# Altium PCB stm32f373-relay-control.PcbDoc (part 1 of 2)
Units mm, origin at the board's own origin, x right, y up, seen from the top; angles counter-clockwise.
Board outline 127.01 x 87.01 mm, 2 copper layers (Top Layer, Bottom Layer), stack 1.571 mm thick; 178 components, 124 nets, 682 pads, 208 vias.
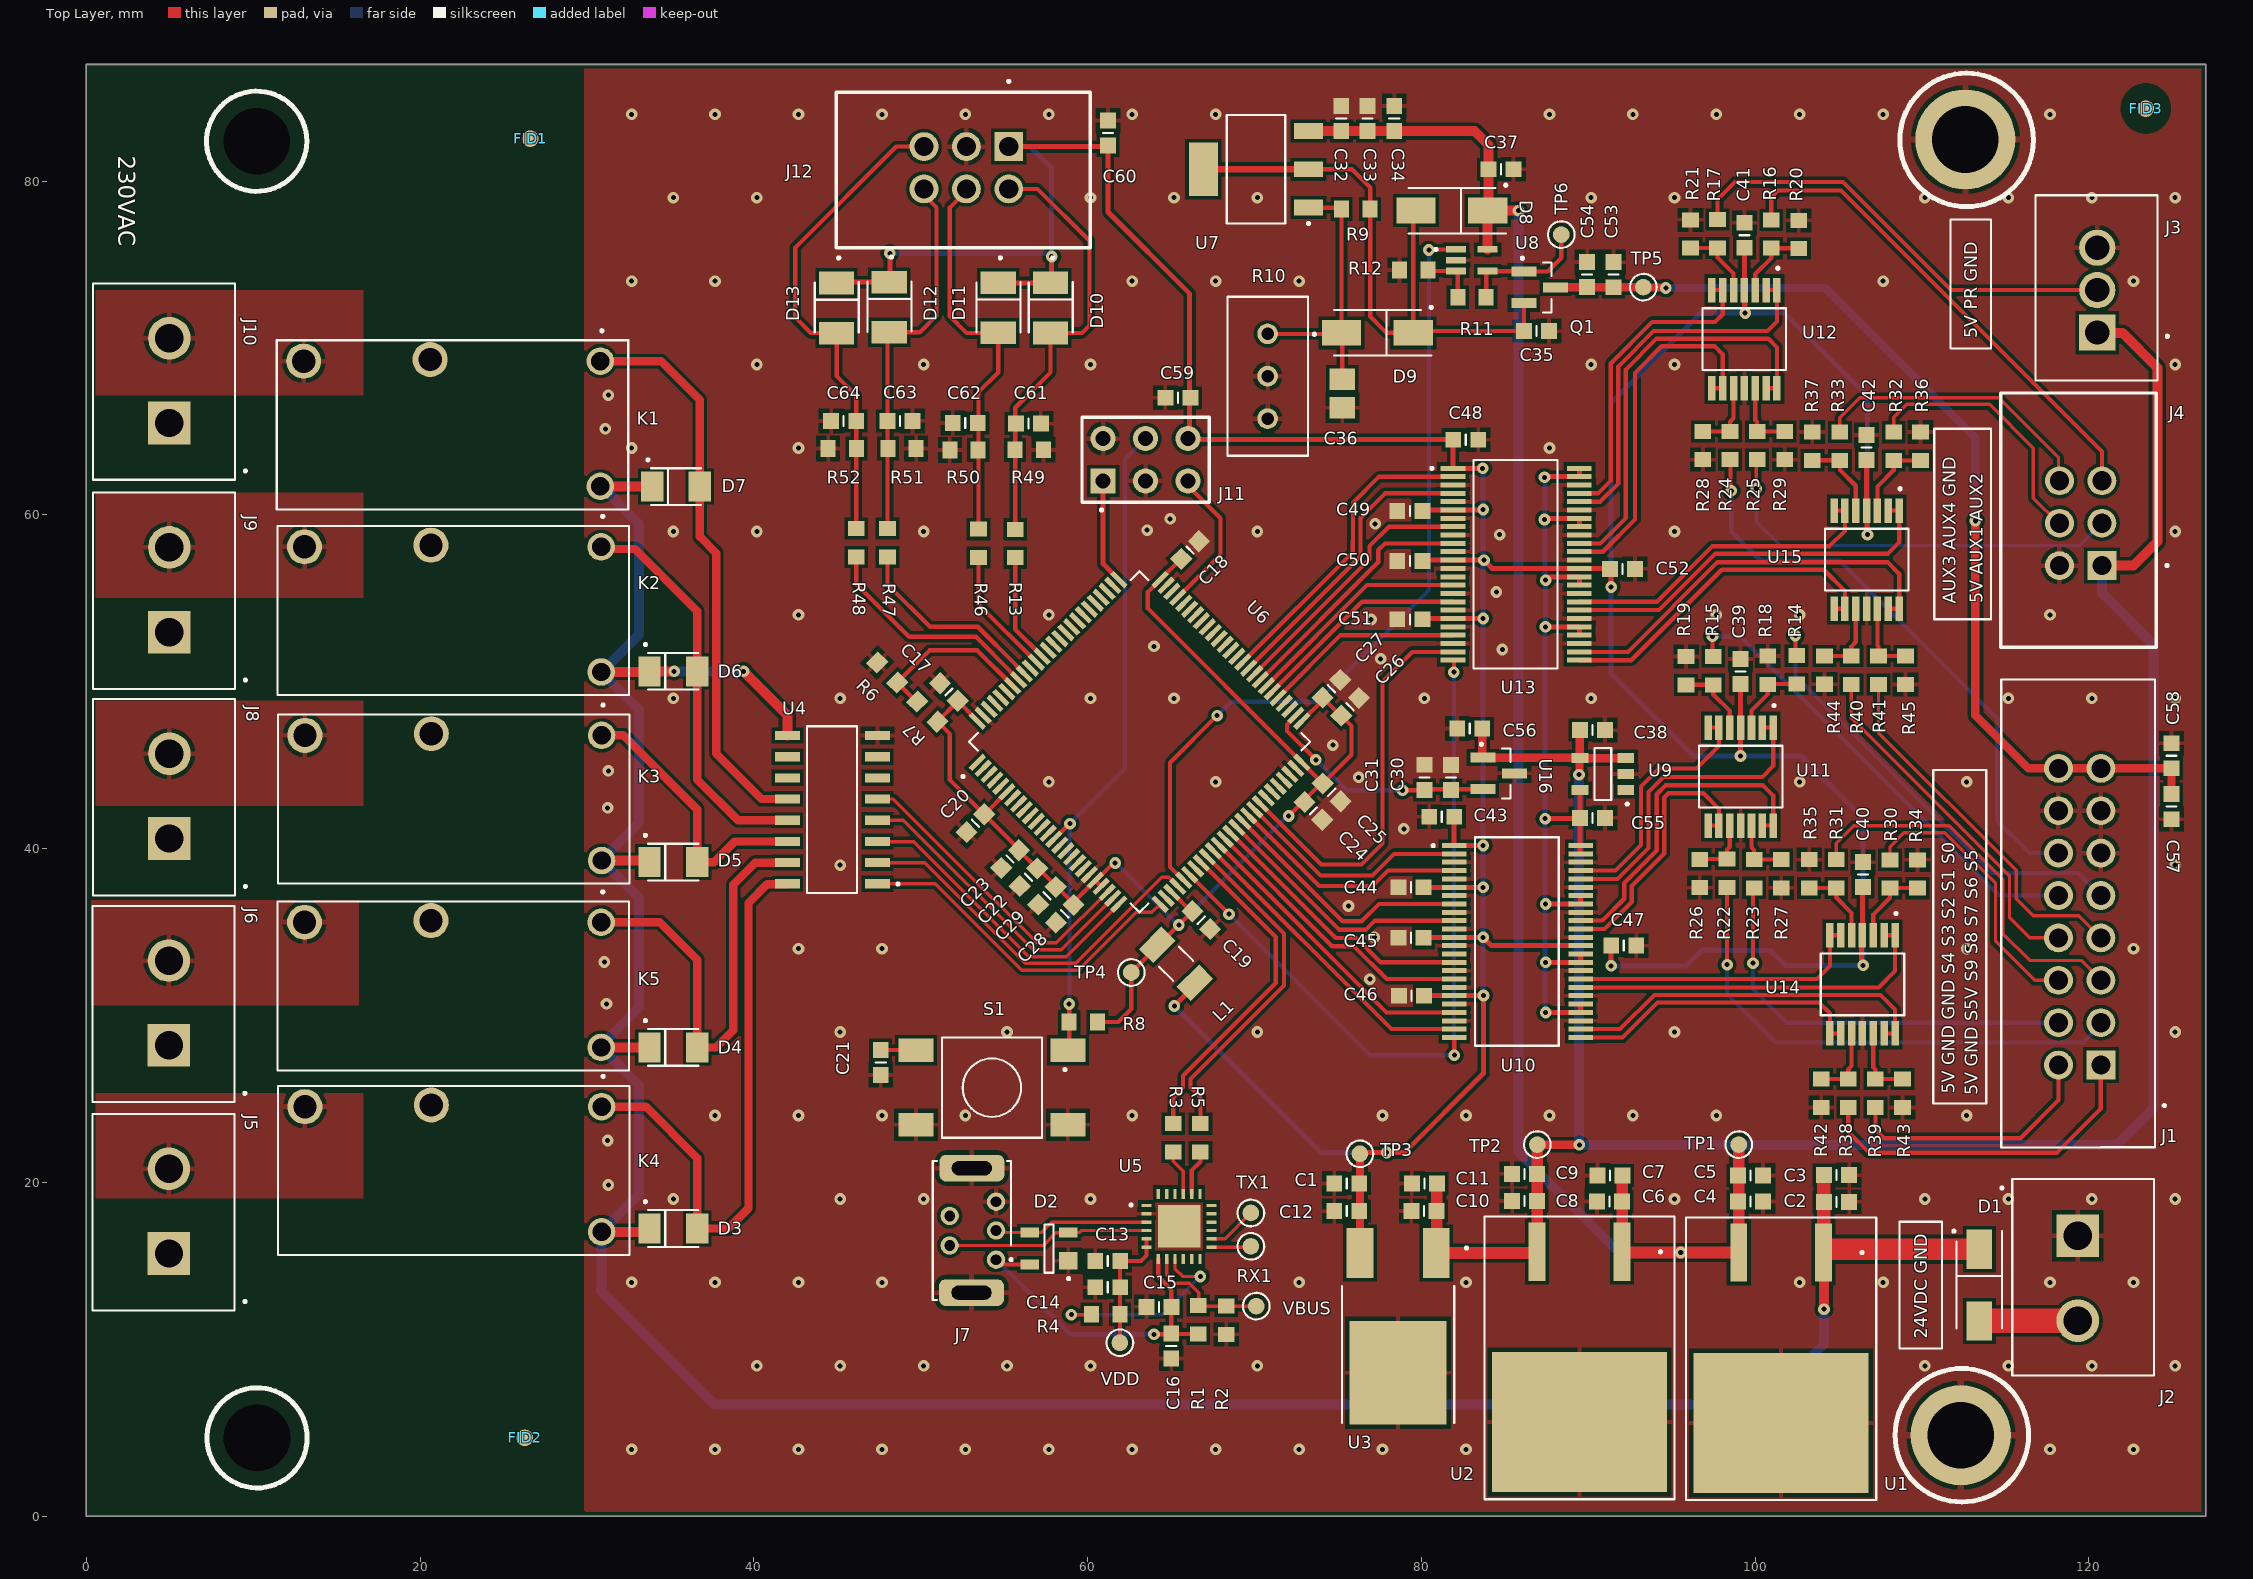
[diagram p0: Top Layer view]
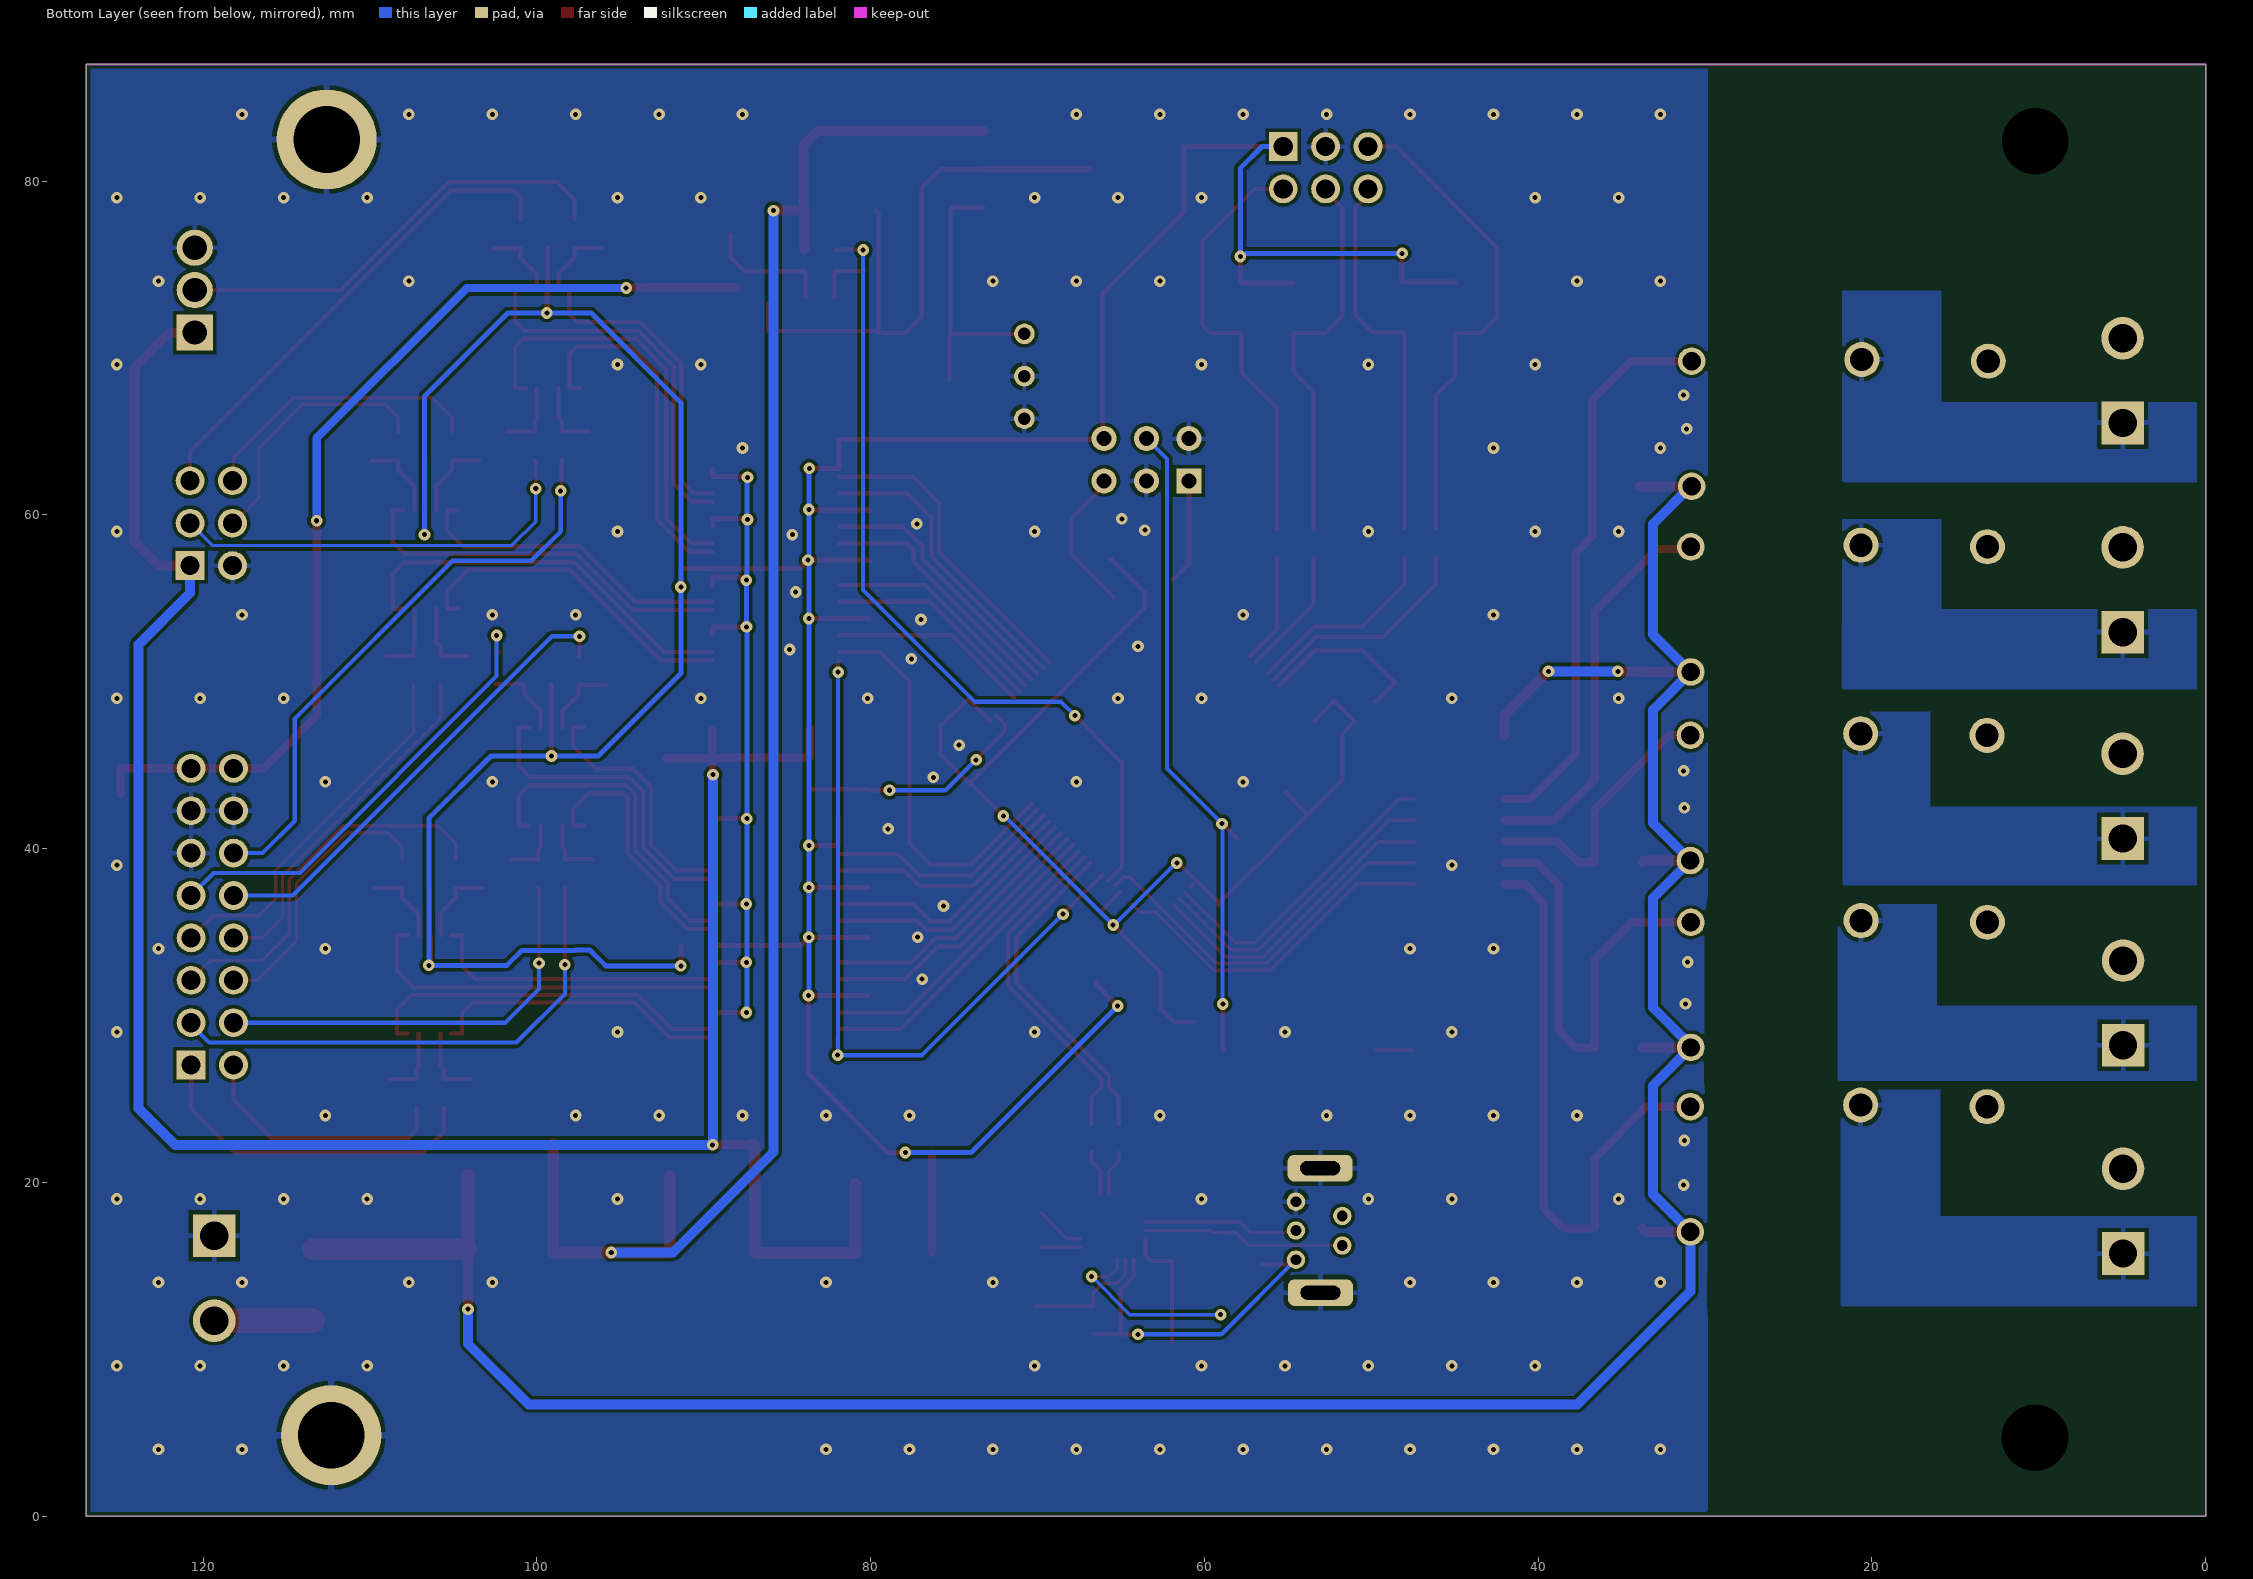
[diagram p1: Bottom Layer view, seen from below]
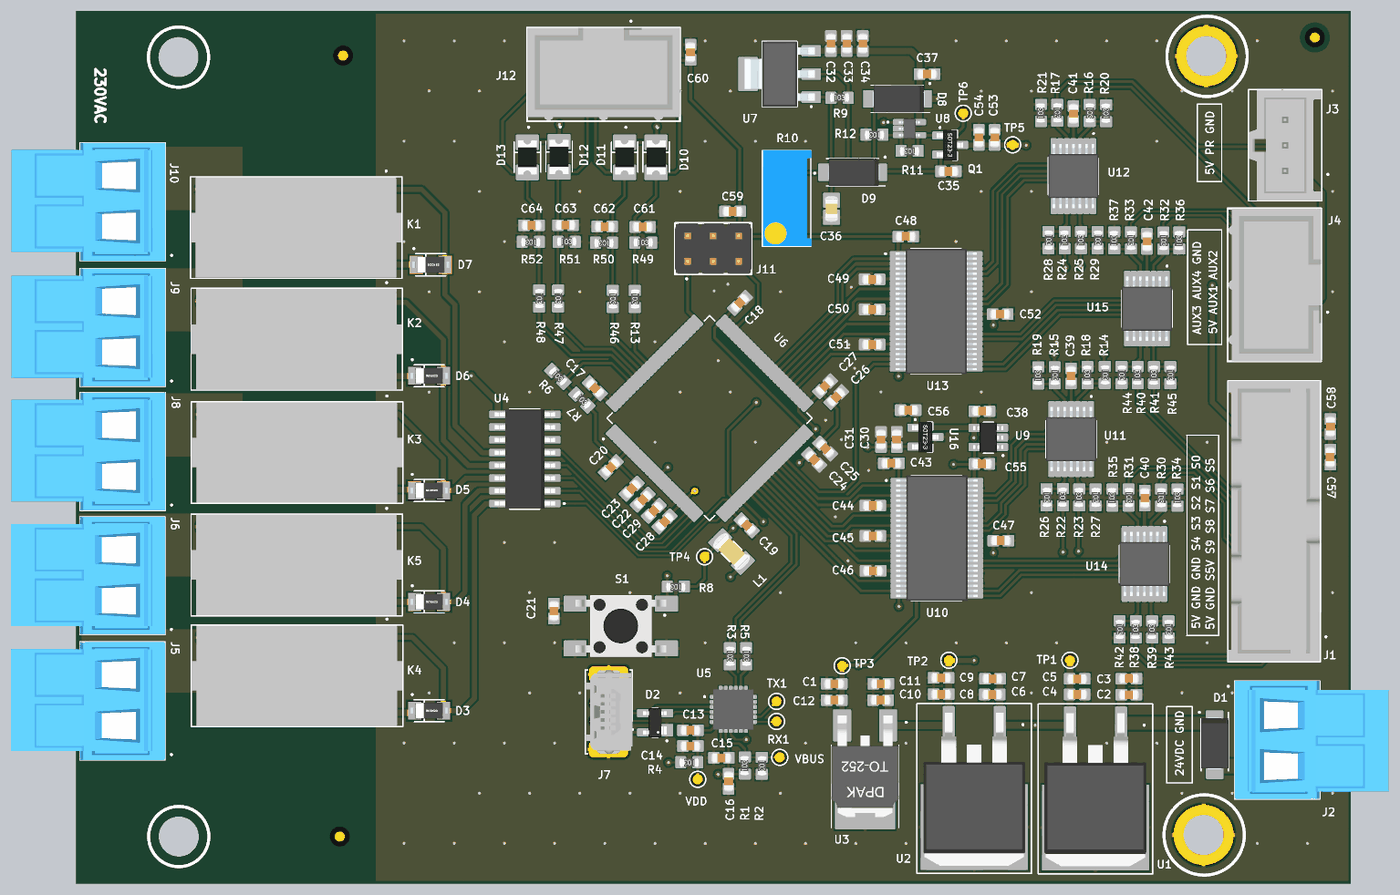
[diagram p3: 3D render of the assembled board from above, using the file's embedded part models]

## Layer stack, top to bottom
Top Solder: solder mask 0.0102, Solder Resist, Dk 3.5
Top Layer: signal copper 0.0356
Dielectric 1: dielectric 1.5, FR-4, Dk 4.8
Bottom Layer: signal copper 0.0356
Bottom Solder: solder mask 0.0102, Solder Resist, Dk 3.5

## Board outline
0,0 127,0 127.004,-0.004 127.004,86.996 127.001,86.995 0.001,86.995 -0.005,87.004

## Design rules (kind name [scope] priority, off if disabled: settings)
Clearance Clearance_AC [InNetClass('230_VAC') vs InNet('GND')] p1: gap=8 ignorepadtopadclearanceinfootprint=TRUE
Clearance [All] p2: gap=0.2 ignorepadtopadclearanceinfootprint=TRUE
DiffPairsRouting DiffPair_DiffPairsRouting [InDifferentialPair ('D')] p1: maxlimit=0.254 minlimit=0.254 mostfreqgap=0.254 substack1={61695DC3-D503-45D9-97A6-45A4C5753EBB} toplayer_{61695dc3-d503-45d9-97a6-45a4c5753ebb}_minwidth=0.381 toplayer_{61695dc3-d503-45d9-97a6-45a4c5753ebb}_maxwidth=0.381 toplayer_{61695dc3-d503-45d9-97a6-45a4c5753ebb}_prefwidth=0.381 bottomlayer_{61695dc3-d503-45d9-97a6-45a4c5753ebb}_minwidth=0.381 bottomlayer_{61695dc3-d503-45d9-97a6-45a4c5753ebb}_maxwidth=0.381 bottomlayer_{61695dc3-d503-45d9-97a6-45a4c5753ebb}_prefwidth=0.381 toplayer_minwidth=0.381 toplayer_maxwidth=0.381 toplayer_prefwidth=0.381 bottomlayer_minwidth=0.381 bottomlayer_maxwidth=0.381 bottomlayer_prefwidth=0.381 substack2={F3A2BA66-AB92-4B2A-958A-8FC78D449C06} toplayer_{f3a2ba66-ab92-4b2a-958a-8fc78d449c06}_minwidth=0.381 toplayer_{f3a2ba66-ab92-4b2a-958a-8fc78d449c06}_maxwidth=0.381 toplayer_{f3a2ba66-ab92-4b2a-958a-8fc78d449c06}_prefwidth=0.381 bottomlayer_{f3a2ba66-ab92-4b2a-958a-8fc78d449c06}_minwidth=0.381 bottomlayer_{f3a2ba66-ab92-4b2a-958a-8fc78d449c06}_maxwidth=0.381 bottomlayer_{f3a2ba66-ab92-4b2a-958a-8fc78d449c06}_prefwidth=0.381 substack3={7FF46698-FA8C-4FAF-96D8-381F52804F8B} toplayer_{7ff46698-fa8c-4faf-96d8-381f52804f8b}_minwidth=0.381 toplayer_{7ff46698-fa8c-4faf-96d8-381f52804f8b}_maxwidth=0.381 toplayer_{7ff46698-fa8c-4faf-96d8-381f52804f8b}_prefwidth=0.381 bottomlayer_{7ff46698-fa8c-4faf-96d8-381f52804f8b}_minwidth=0.381 bottomlayer_{7ff46698-fa8c-4faf-96d8-381f52804f8b}_maxwidth=0.381 bottomlayer_{7ff46698-fa8c-4faf-96d8-381f52804f8b}_prefwidth=0.381 maxuncoupledlength=12.7
DiffPairsRouting [InDifferentialPair('D')] p2: maxlimit=0.254 minlimit=0.254 mostfreqgap=0.254 substack1={61695DC3-D503-45D9-97A6-45A4C5753EBB} toplayer_{61695dc3-d503-45d9-97a6-45a4c5753ebb}_minwidth=0.381 toplayer_{61695dc3-d503-45d9-97a6-45a4c5753ebb}_maxwidth=0.381 toplayer_{61695dc3-d503-45d9-97a6-45a4c5753ebb}_prefwidth=0.381 bottomlayer_{61695dc3-d503-45d9-97a6-45a4c5753ebb}_minwidth=0.381 bottomlayer_{61695dc3-d503-45d9-97a6-45a4c5753ebb}_maxwidth=0.381 bottomlayer_{61695dc3-d503-45d9-97a6-45a4c5753ebb}_prefwidth=0.381 toplayer_minwidth=0.381 toplayer_maxwidth=0.381 toplayer_prefwidth=0.381 bottomlayer_minwidth=0.381 bottomlayer_maxwidth=0.381 bottomlayer_prefwidth=0.381 substack2={F3A2BA66-AB92-4B2A-958A-8FC78D449C06} toplayer_{f3a2ba66-ab92-4b2a-958a-8fc78d449c06}_minwidth=0.381 toplayer_{f3a2ba66-ab92-4b2a-958a-8fc78d449c06}_maxwidth=0.381 toplayer_{f3a2ba66-ab92-4b2a-958a-8fc78d449c06}_prefwidth=0.381 bottomlayer_{f3a2ba66-ab92-4b2a-958a-8fc78d449c06}_minwidth=0.381 bottomlayer_{f3a2ba66-ab92-4b2a-958a-8fc78d449c06}_maxwidth=0.381 bottomlayer_{f3a2ba66-ab92-4b2a-958a-8fc78d449c06}_prefwidth=0.381 substack3={7FF46698-FA8C-4FAF-96D8-381F52804F8B} toplayer_{7ff46698-fa8c-4faf-96d8-381f52804f8b}_minwidth=0.381 toplayer_{7ff46698-fa8c-4faf-96d8-381f52804f8b}_maxwidth=0.381 toplayer_{7ff46698-fa8c-4faf-96d8-381f52804f8b}_prefwidth=0.381 bottomlayer_{7ff46698-fa8c-4faf-96d8-381f52804f8b}_minwidth=0.381 bottomlayer_{7ff46698-fa8c-4faf-96d8-381f52804f8b}_maxwidth=0.381 bottomlayer_{7ff46698-fa8c-4faf-96d8-381f52804f8b}_prefwidth=0.381 maxuncoupledlength=12.7
HoleSize [All] p1: absolutevalues=TRUE maxlimit=10 minlimit=0.025 maxpercent=80.000 minpercent=20.000
HoleToHoleClearance [All] p1: gap=0.2 allowstackedmicrovias=TRUE
MatchedLengths DiffPair_MatchedLengths [InDifferentialPair ('D')] p1: tolerance=25.4 checknetsindiffpair=FALSE checkdiffpairvsdiffpair=TRUE checkxsignals=TRUE checkothers=TRUE
MinimumSolderMaskSliver [All] p1: minsoldermaskwidth=0.1
PasteMaskExpansion [All] p1: expansion=0.1
PlaneClearance [All] p1: clearance=0.5
PlaneConnect [All] p1: pad.planeconnectstyle=Relief pad.reliefexpansion=0.508 pad.reliefentries=4 pad.reliefconductorwidth=0.254 pad.reliefairgap=0.254 via.planeconnectstyle=Direct via.reliefexpansion=0.508 via.reliefentries=4 via.reliefconductorwidth=0.254 via.reliefairgap=0.254
PolygonConnect [All] p1: thpad.connectstyle=Relief thpad.reliefconductorwidth=0.3 thpad.reliefentries=4 thpad.polygonreliefangle="90 Angle" thpad.airgapwidth=0.254 smdpad.connectstyle=Relief smdpad.reliefconductorwidth=0.254 smdpad.reliefentries=4 smdpad.polygonreliefangle="90 Angle" smdpad.airgapwidth=0.254 via.connectstyle=Direct via.reliefconductorwidth=0.254 via.reliefentries=4 via.polygonreliefangle="90 Angle" via.airgapwidth=0.254
RoutingVias [All] p1: holewidth=0.3 width=0.7 viastyle="Through Hole" minholewidth=0.3 minwidth=0.7 maxholewidth=1 maxwidth=1.5
SilkToSilkClearance [All] p1: silktosilkclearance=0.2
SilkToSolderMaskClearance [IsPad] p1: minsilkscreentomaskgap=0.1 clearancetoexposedcopper=TRUE
SolderMaskExpansion [All] p1: expansion=0.1 istentingtop=FALSE soldermaskfromhole=TRUE
UnRoutedNet [All] p1: checkbadconnections=TRUE
Width [All] p1: maxlimit=4 minlimit=0.2 preferedwidth=0.254 substack1={61695DC3-D503-45D9-97A6-45A4C5753EBB} substack2={F3A2BA66-AB92-4B2A-958A-8FC78D449C06} substack3={7FF46698-FA8C-4FAF-96D8-381F52804F8B} checkconnectedcopper=TRUE
20 further rules are at their usual default settings.

## Classes and differential pairs
net class GPIO[1..4]: GPIO1 GPIO2 GPIO3 GPIO4
net class 230_VAC: RELAYCON1 RELAYCON2 RELAYCON3 RELAYCON4 RELAYCON5 RELAYCON6 RELAYCON7 RELAYCON8 RELAYCON9 RELAYCON10
net class SDADC3[1..7]: SDADC31 SDADC32 SDADC33 SDADC34 SDADC35 SDADC36 SDADC37
net class SDADC1[1..9]: SDADC11 SDADC12 SDADC13 SDADC14 SDADC15 SDADC16 SDADC17 SDADC18 SDADC19
net class RELAYCON[1..10]: RELAYCON1 RELAYCON2 RELAYCON3 RELAYCON4 RELAYCON5 RELAYCON6 RELAYCON7 RELAYCON8 RELAYCON9 RELAYCON10
net class DRIVE[1..5]: DRIVE1 DRIVE2 DRIVE3 DRIVE4 DRIVE5
component class U_USB: C13 C14 C15 C16 R1 R2 R3 R4 R5 RX1 TX1 U5 VBUS VDD
component class "U_Sensor Power Supply": C32 C33 C34 C35 C36 C37 C53 C54 D8 D9 Q1 R9 R10 R11 R12 TP5 TP6 U7 U8
component class U_Relays: D3 D4 D5 D6 D7 K1 K2 K3 K4 K5 U4
component class "U_Power Supply": C1 C2 C3 C4 C5 C6 C7 C8 C9 C10 C11 C12 FID1 FID2 FID3 TP1 TP2 TP3 U1 U2 U3
component class "U_OP AMPS": C38 C39 C40 C41 C42 C43 C44 C45 C46 C47 C48 C49 C50 C51 C52 C55 R14 R15 R16 R17 R18 R19 R20 R21 R22 R23 R24 R25 R26 R27 R28 R29 R30 R31 R32 R33 R34 R35 R36 R37 R38 R39 R40 R41 R42 R43 R44 R45 U9 U10 U11 U12 U13 U14 U15
component class U_MCU: C17 C18 C19 C20 C21 C22 C23 C24 C25 C26 C27 C28 C29 C30 C31 C56 L1 R6 R7 R8 S1 TP4 U6 U16
component class U_Connectors: C57 C58 C59 C60 C61 C62 C63 C64 D1 D2 D10 D11 D12 D13 J1 J2 J3 J4 J5 J6 J7 J8 J9 J10 J11 J12 R13 R46 R47 R48 R49 R50 R51 R52

## Components (designator, comment, footprint, x,y, rotation, side; value= is the part's Value field where it differs from the comment)
C1 "Capacitor" CAPC1608N 75.531,19.929 r0 top
C2 "Capacitor" CAPC1608N 104.884,18.837 r0 top
C3 "Capacitor" CAPC1608N 104.884,20.437 r180 top
C4 "Capacitor" CAPC1608N 99.727,18.859 r180 top
C5 "Capacitor" CAPC1608N 99.727,20.416 r0 top
C6 "Capacitor" CAPC1608N 91.27,18.859 r0 top
C7 "Capacitor" CAPC1608N 91.304,20.416 r180 top
C8 "Capacitor" CAPC1608N 86.189,18.887 r0 top
C9 "Capacitor" CAPC1608N 86.179,20.512 r180 top
C10 "Capacitor" CAPC1608N 80.152,18.29 r180 top
C11 "Capacitor" CAPC1608N 80.181,19.929 r0 top
C12 "Capacitor" CAPC1608N 75.531,18.279 r180 top
C13 "Capacitor" CAPC1608N 61.209,15.294 r0 top
C14 "Capacitor" CAPC1608N 61.209,13.717 r0 top
C15 "Capacitor" CAPC1608N 64.284,12.544 r0 top
C16 "Capacitor" CAPC1608N 65.009,10.194 r90 top
C17 "Capacitor" CAPC1608N 51.688,49.388 r135 top
C18 "Capacitor" CAPC1608N 66.14,57.893 r225 top
C19 "Capacitor" CAPC1608N 66.81,35.714 r135 top
C20 "Capacitor" CAPC1608N 53.276,41.526 r45 top
C21 "Capacitor" CAPC1608N 47.603,27.183 r90 top
C22 "Capacitor" CAPC1608N 56.459,38.284 r45 top
C23 "Capacitor" CAPC1608N 55.359,39.372 r45 top
C24 "Capacitor" CAPC1608N 73.535,42.262 r135 top
C25 "Capacitor" CAPC1608N 74.625,43.375 r135 top
C26 "Capacitor" CAPC1608N 75.729,48.502 r225 top
C27 "Capacitor" CAPC1608N 74.611,49.58 r225 top
C28 "Capacitor" CAPC1608N 58.628,36.098 r45 top
C29 "Capacitor" CAPC1608N 57.567,37.177 r45 top
C30 "Capacitor" CAPC1608N 81.767,44.273 r270 top
C31 "Capacitor" CAPC1608N 80.188,44.275 r270 top
C32 "Capacitor" CAPC1608N 75.204,83.754 r90 top
C33 "Capacitor" CAPC1608N 76.779,83.754 r90 top
C34 "Capacitor" CAPC1608N 78.379,83.754 r90 top
C35 "Capacitor" CAPC1608N 86.904,71.011 r0 top
C36 "Capacitor" CAPC2012N 75.261,67.276 r270 top
C37 "Capacitor" CAPC1608N 84.777,80.711 r0 top
C38 "Capacitor" CAPC1608N 90.251,47.102 r180 top
C39 "Capacitor" CAPC1608N 99.121,50.613 r90 top
C40 "Capacitor" CAPC1608N 106.465,38.443 r90 top
C41 "Capacitor" CAPC1608N 99.359,76.756 r90 top
C42 "Capacitor" CAPC1608N 106.684,64.033 r90 top
C43 "Capacitor" CAPC1608N 81.221,41.911 r0 top
C44 "Capacitor" CAPC1608N 79.377,37.684 r0 top
C45 "Capacitor" CAPC1608N 79.378,34.661 r0 top
C46 "Capacitor" CAPC1608N 79.403,31.186 r0 top
C47 "Capacitor" CAPC1608N 92.128,34.186 r180 top
C48 "Capacitor" CAPC1608N 82.662,64.504 r180 top
C49 "Capacitor" CAPC1608N 79.309,60.243 r0 top
C50 "Capacitor" CAPC1608N 79.309,57.243 r0 top
C51 "Capacitor" CAPC1608N 79.309,53.743 r0 top
C52 "Capacitor" CAPC1608N 92.059,56.768 r180 top
C53 "Capacitor" CAPC1608N 91.509,74.396 r90 top
C54 "Capacitor" CAPC1608N 89.935,74.4 r90 top
C55 "Capacitor" CAPC1608N 90.248,41.844 r180 top
C56 "Capacitor" CAPC1608N 82.903,47.197 r0 top
C57 "Capacitor" CAPC1608N 124.952,42.515 r270 top
C58 "Capacitor" CAPC1608N 124.952,45.565 r90 top
C59 "Capacitor" CAPC1608N 65.41,67.018 r0 top
C60 "Capacitor" CAPC1608N 61.223,82.885 r270 top
C61 "Capacitor" CAPC1608N 56.45,65.469 r180 top
C62 "Capacitor" CAPC1608N 52.668,65.508 r0 top
C63 "Capacitor" CAPC1608N 48.764,65.636 r180 top
C64 "Capacitor" CAPC1608N 45.383,65.63 r0 top
D1 "S1M" DIOM5227X270N 113.434,13.848 r270 top
D2 "SP0503BAHTG" SOT-143 57.684,16.034 r180 top
D3 "SS24FL" SOD-123F 35.175,17.238 r0 top
D4 "SS24FL" SOD-123F 35.175,28.088 r0 top
D5 "SS24FL" SOD-123F 35.175,39.194 r0 top
D6 "SS24FL" SOD-123F 35.175,50.627 r0 top
D7 "SS24FL" SOD-123F 35.332,61.695 r0 top
D8 "S1M" DIOM5227X270N 81.827,78.235 r180 top
D9 "S1M" DIOM5227X270N 77.362,70.912 r180 top
D10 "CD1408-FU1200" SOD-87 57.784,72.4 r270 top
D11 "CD1408-FU1200" SOD-87 54.647,72.404 r270 top
D12 "CD1408-FU1200" SOD-87 48.114,72.447 r270 top
D13 "CD1408-FU1200" SOD-87 44.961,72.397 r270 top
FID1 "Fiducial" FIDUCIAL-1MM 26.6,82.55 r0 top
FID2 "Fiducial" FIDUCIAL-1MM 26.275,4.693 r90 top
FID3 "Fiducial" FIDUCIAL-1MM 123.414,84.352 r90 top
J1 "5103308-3" 5103308-3 120.72,27.032 r270 top
J2 "CUI_TBP01R2-508-02BE" CUI_TBP01R2-508-02BE 119.337,16.793 r270 top
J3 "90136-1103" HDR1X3 120.503,70.929 r90 top
J4 "2-1761603-1" 2-1761603-1 119.51,59.503 r90 top
J5 "CUI_TBP01R2-508-02BE" CUI_TBP01R2-508-02BE 4.95,15.738 r90 top
J6 "CUI_TBP01R2-508-02BE" CUI_TBP01R2-508-02BE 4.95,28.213 r90 top
J7 "502237-0517" 502237-0517 54.518,15.369 r90 top
J8 "CUI_TBP01R2-508-02BE" CUI_TBP01R2-508-02BE 4.975,40.608 r90 top
J9 "CUI_TBP01R2-508-02BE" CUI_TBP01R2-508-02BE 4.975,52.978 r90 top
J10 "CUI_TBP01R2-508-02BE" CUI_TBP01R2-508-02BE 4.975,65.508 r90 top
J11 "61300621121" HDR2X3 60.932,62.035 r0 top
J12 "2-1761603-1" 2-1761603-1 52.735,80.803 r180 top
K1 "HF 46F/24-HS1TF" G6BU-1114P 30.8,69.213 r180 top
K2 "HF 46F/24-HS1TF" G6BU-1114P 30.85,58.088 r180 top
K3 "HF 46F/24-HS1TF" G6BU-1114P 30.875,46.788 r180 top
K4 "HF 46F/24-HS1TF" G6BU-1114P 30.875,24.538 r180 top
K5 "HF 46F/24-HS1TF" G6BU-1114P 30.85,35.588 r180 top
L1 "2512067007Y3" INDC3216N 65.3,33.102 r135 top
Q1 "BC817-40Q-7-F" SOT23-3N 87.092,73.635 r0 top
R1 "Resistor" RESC1608N 66.634,11.769 r90 top
R2 "Resistor" RESC1608N 68.309,11.744 r270 top
R3 "Resistor" RESC1608N 65.134,22.669 r270 top
R4 "Resistor" RESC1608N 61.084,12.101 r180 top
R5 "Resistor" RESC1608N 66.759,22.669 r270 top
R6 "Resistor" RESC1608N 50.396,48.211 r315 top
R7 "Resistor" RESC1608N 47.991,50.553 r315 top
R8 "Resistor" RESC1608N 59.749,29.617 r180 top
R9 "Resistor" RESC1608N 76.066,78.336 r0 top
R10 "3296W-1-502RLF" 3296W-1-502RLF 70.787,70.851 r270 top
R11 "Resistor" RESC1608N 83.036,73.046 r180 top
R12 "Resistor" RESC1608N 79.543,74.671 r180 top
R13 "Resistor" RESC1608N 55.665,58.288 r270 top
R14 "Resistor" RESC1608N 102.487,50.715 r270 top
R15 "Resistor" RESC1608N 97.493,50.671 r270 top
R16 "Resistor" RESC1608N 100.972,76.831 r270 top
R17 "Resistor" RESC1608N 97.745,76.846 r270 top
R18 "Resistor" RESC1608N 100.762,50.69 r90 top
R19 "Resistor" RESC1608N 95.864,50.663 r90 top
R20 "Resistor" RESC1608N 102.622,76.806 r90 top
R21 "Resistor" RESC1608N 96.131,76.831 r90 top
R22 "Resistor" RESC1608N 98.318,38.523 r90 top
R23 "Resistor" RESC1608N 99.941,38.502 r90 top
R24 "Resistor" RESC1608N 98.497,64.156 r90 top
R25 "Resistor" RESC1608N 100.122,64.156 r90 top
R26 "Resistor" RESC1608N 96.681,38.51 r270 top
R27 "Resistor" RESC1608N 101.566,38.502 r270 top
R28 "Resistor" RESC1608N 96.872,64.156 r270 top
R29 "Resistor" RESC1608N 101.772,64.156 r270 top
R30 "Resistor" RESC1608N 108.085,38.483 r270 top
R31 "Resistor" RESC1608N 104.865,38.493 r270 top
R32 "Resistor" RESC1608N 108.309,64.108 r270 top
R33 "Resistor" RESC1608N 105.082,64.123 r270 top
R34 "Resistor" RESC1608N 109.735,38.483 r90 top
R35 "Resistor" RESC1608N 103.24,38.493 r90 top
R36 "Resistor" RESC1608N 109.913,64.117 r90 top
R37 "Resistor" RESC1608N 103.432,64.123 r90 top
R38 "Resistor" RESC1608N 105.584,25.343 r90 top
R39 "Resistor" RESC1608N 107.209,25.343 r90 top
R40 "Resistor" RESC1608N 105.766,50.693 r90 top
R41 "Resistor" RESC1608N 107.391,50.693 r90 top
R42 "Resistor" RESC1608N 103.959,25.343 r270 top
R43 "Resistor" RESC1608N 108.834,25.343 r270 top
R44 "Resistor" RESC1608N 104.155,50.702 r270 top
R45 "Resistor" RESC1608N 109.012,50.693 r270 top
R46 "Resistor" RESC1608N 53.467,58.293 r270 top
R47 "Resistor" RESC1608N 48.014,58.334 r270 top
R48 "Resistor" RESC1608N 46.133,58.334 r270 top
R49 "Resistor" RESC1608N 56.503,63.895 r0 top
R50 "Resistor" RESC1608N 52.595,63.894 r180 top
R51 "Resistor" RESC1608N 48.881,63.981 r0 top
R52 "Resistor" RESC1608N 45.304,63.981 r180 top
RX1 "Test Point" TP 69.784,16.169 r0 top
S1 "FSM4JSMA" FSM4 54.267,25.68 r90 top
TP1 "Test Point" TP 99.018,22.268 r0 top
TP2 "Test Point" TP 86.95,22.268 r0 top
TP3 "Test Point" TP 76.32,21.715 r0 top
TP4 "Test Point" TP 62.616,32.58 r45 top
TP5 "Test Point" TP 93.305,73.65 r0 top
TP6 "Test Point" TP 88.383,76.8 r270 top
TX1 "Test Point" TP 69.784,18.169 r0 top
U1 "L7812CD2T-TR" D2PAK 101.559,10.693 r180 top
U2 "L7805CDT-TR" D2PAK 89.479,10.743 r180 top
U3 "LF33CDT-TRY" DPAK 78.606,12.179 r90 top
U4 "ULN2003AD" SOIC-16 44.715,42.337 r90 top
U5 "CP2102N-A02-GQFN24" QFN-24 65.509,17.369 r0 top
U6 "STM32F373V8T6" LQFP100 63.112,46.403 r45 top
U7 "LM317AEMP/NOPB" SOT-223-4 70.091,80.711 r180 top
U8 "LMV321AIDCKR" SC-70-5 83.077,75.263 r270 top
U9 "REF4132A25DBVR" SOT-23-5 90.878,44.471 r180 top
U10 "PI3L301DAEX" SOP-48 85.759,34.436 r0 top
U11 "TLV9004IPWR" TSSOP-14 99.134,44.318 r270 top
U12 "TLV9004IPWR" TSSOP-14 99.359,70.531 r270 top
U13 "PI3L301DAEX" SOP-48 85.684,57.043 r0 top
U14 "TLV9004IPWR" TSSOP-14 106.434,31.868 r270 top
U15 "TLV9004IPWR" TSSOP-14 106.684,57.318 r270 top
U16 "REF3130AQDBZRQ1" SOT23-3N 84.634,44.511 r0 top
VBUS "Test Point" TP 70.105,12.588 r90 top
VDD "Test Point" TP 61.934,10.395 r90 top

## Footprints (in the part's own frame and the unit in brackets; to place one, negate y for a bottom-side part, rotate by r counter-clockwise, add the part's x,y. Pads: shape width x height; smd on the part's side, far side on the other; paste and mask are expansions set on the pad)
2-1761603-1 [mm]
  rect 1.725x1.725 hole 1.15: 1(-2.54,-1.27)
  round 1.725 hole 1.15: 2(-2.54,1.27) 3(0,-1.27) 4(0,1.27) 5(2.54,-1.27) 6(2.54,1.27)
  silkscreen extent -7.42,-5.25 7.8,4.8, body extent -7.44,-4.51 7.8,4.71, height 9
3296W-1-502RLF [mm]
  round 1.24 hole 0.74: 1(0,0) 2(2.54,0) 3(5.08,0)
  silkscreen extent -2.22,-2.41 7.3,2.88, body extent -2.22,-2.37 7.31,2.46, height 11.8
502237-0517 [mm]
  round 1.1 hole 0.65: 1(0,0) 2(0.85,2.783) 3(1.75,0) 4(2.625,2.783) 5(3.475,0)
  rrect50% 1.6x3.9 hole 2.4 slot 0.85 at 0 deg: MP1(-1.975,1.475) MP2(5.484,1.45)
  silkscreen extent -2.43,-0.98 5.93,3.8, body extent -2.43,-0.9 5.92,3.8, height 7.9
5103308-3 [mm]
  rect 1.725x1.725 hole 1.15: 1(0,0)
  round 1.725 hole 1.15: 2(0,-2.54) 3(-2.54,0) 4(-2.54,-2.54) 5(-5.08,0) 6(-5.08,-2.54) 7(-7.62,0) 8(-7.62,-2.54) 9(-10.16,0) 10(-10.16,-2.54) 11(-12.7,0) 12(-12.7,-2.54) 13(-15.24,0) 14(-15.24,-2.54) 15(-17.78,0) 16(-17.78,-2.54)
  silkscreen extent -23.11,-5.97 4.93,3.88, body extent -23.07,-5.94 4.87,3.2, height 10
CAPC1608N [mm]
  rrect0% 0.95x0.95 smd: 1(-0.75,0) 2(0.75,0)
  silkscreen extent 0,-0.3 0,0.3, body extent -1.05,-0.53 1.05,0.5, height 0.81
CAPC2012N [mm] "Chip Capacitor, Body 2.0x1.3mm, IPC Medium Density"
  rect 1.3x1.5 smd: 1(-0.85,0) 2(0.85,0)
  body extent -1.3,-0.68 1.3,0.68, height 0.9
CUI_TBP01R2-508-02BE [mm]
  rect 2.55x2.55 hole 1.7: 1(0,0)
  round 2.55 hole 1.7: 2(5.08,0)
  silkscreen extent -3.41,-4.63 8.36,4.58, body extent -3.41,-3.93 8.36,11.43, height 20.5
D2PAK [mm]
  rect 1.016x3.504 smd mask+0.07: 1(-2.54,-5.106) 3(2.54,-5.106)
  rect 10.49x8.38 smd mask+0.07: 2(0,5.106)
  silkscreen extent -5.7,-7.21 5.7,9.73, body extent -5.08,-6.32 5.08,8.95, height 4.98
DIOM5227X270N [mm]
  rect 2.35x1.55 smd: 1(-2.15,0) 2(2.15,0)
  silkscreen extent -3.31,-1.6 2.6,1.36, body extent -2.73,-1.36 2.47,1.36, height 2.7
DPAK [mm]
  rect 3x1.6 smd: 1(3.59,-2.286) 3(3.59,2.286)
  rect 6.2x5.8 smd: 2(-3.59,0)
  silkscreen extent -6.59,-4.18 3.98,3.36, body extent -5.53,-3.37 4.57,3.37, height 2.37
FIDUCIAL-1MM [mm] "1MM FIDUCAL MARKER"
  round 1 smd paste-1 mask+0.5: F1(0,0)
  Top Layer pour cut-out: -1.5,0 -1.386,-0.574 -1.061,-1.061 -0.574,-1.386 0,-1.5 0,-1.5 0.574,-1.386 1.061,-1.061 1.386,-0.574 1.5,0 1.5,0 1.386,0.574 1.061,1.061 0.574,1.386 0,1.5 0,1.5 -0.574,1.386 -1.061,1.061 -1.386,0.574 -1.5,0
FSM4 [mm]
  rect 1.4x2.1 smd mask+0.07: 1(2.23,4.55) 1_1(2.23,-4.55) 2(-2.23,4.55) 2_1(-2.23,-4.55)
  silkscreen extent -3,-4.45 3,3, body extent -3.02,-4.51 3.02,4.51, height 5
G6BU-1114P [mm]
  round 1.65 hole 1.1: 1(0,0) 6(0,7.5)
  round 2.1 hole 1.4: 3(17.775,0) 4(10.2,-0.1)
  silkscreen extent -1.68,-1.9 19.39,8.89, body extent -1.61,-1.19 19.39,8.81, height 10
HDR1X3 [mm]
  rect 2.175x2.175 / inner round 2.175 / far side rect 2.175x2.175 hole 1.45: 1(0,0)
  round 2.175 hole 1.45: 2(2.54,0) 3(5.08,0)
  silkscreen extent -2.88,-4.28 8.23,3.7, body extent -2.82,-3.56 8.15,3.65, height 10.85
HDR2X3 [mm] "Connector; Header; 3x2 Position"
  rect 1.5x1.5 hole 0.9: 1(0,0)
  round 1.5 hole 0.9: 2(0,2.54) 3(2.54,0) 4(2.54,2.54) 5(5.08,0) 6(5.08,2.54)
  silkscreen extent -1.27,-1.82 6.35,3.81, body extent -1.27,-1.27 6.35,3.81, height 8.67
INDC3216N [mm] "Chip Inductor, Body 3.2x1.6mm, IPC Medium Density"
  rect 1.2x1.9 smd: 1(-1.6,0) 2(1.6,0)
  silkscreen extent -0.6,-0.85 0.6,0.85, body extent -1.97,-0.98 1.97,0.98, height 1.3
LQFP100 [mil]
  rect 47x12 smd: 1(-305.12,236.22) 2(-305.12,216.54) 3(-305.12,196.85) 4(-305.12,177.17) 5(-305.12,157.48) 6(-305.12,137.8) 7(-305.12,118.11) 8(-305.12,98.43) 9(-305.12,78.74) 10(-305.12,59.06) 11(-305.12,39.37) 12(-305.12,19.69) 13(-305.12,0) 14(-305.12,-19.69) 15(-305.12,-39.37) 16(-305.12,-59.06) 17(-305.12,-78.74) 18(-305.12,-98.43) 19(-305.12,-118.11) 20(-305.12,-137.8) 21(-305.12,-157.48) 22(-305.12,-177.17) 23(-305.12,-196.85) 24(-305.12,-216.54) 25(-305.12,-236.22) 51(305.12,-236.22) 52(305.12,-216.54) 53(305.12,-196.85) 54(305.12,-177.17) 55(305.12,-157.48) 56(305.12,-137.8) 57(305.12,-118.11) 58(305.12,-98.43) 59(305.12,-78.74) 60(305.12,-59.06) 61(305.12,-39.37) 62(305.12,-19.69) 63(305.12,0) 64(305.12,19.69) 65(305.12,39.37) 66(305.12,59.06) 67(305.12,78.74) 68(305.12,98.43) 69(305.12,118.11) 70(305.12,137.8) 71(305.12,157.48) 72(305.12,177.17) 73(305.12,196.85) 74(305.12,216.54) 75(305.12,236.22)
  rect 12x47 smd: 26(-236.22,-305.12) 27(-216.54,-305.12) 28(-196.85,-305.12) 29(-177.17,-305.12) 30(-157.48,-305.12) 31(-137.8,-305.12) 32(-118.11,-305.12) 33(-98.43,-305.12) 34(-78.74,-305.12) 35(-59.06,-305.12) 36(-39.37,-305.12) 37(-19.69,-305.12) 38(0,-305.12) 39(19.69,-305.12) 40(39.37,-305.12) 41(59.06,-305.12) 42(78.74,-305.12) 43(98.43,-305.12) 44(118.11,-305.12) 45(137.8,-305.12) 46(157.48,-305.12) 47(177.17,-305.12) 48(196.85,-305.12) 49(216.54,-305.12) 50(236.22,-305.12) 76(236.22,305.12) 77(216.54,305.12) 78(196.85,305.12) 79(177.17,305.12) 80(157.48,305.12) 81(137.8,305.12) 82(118.11,305.12) 83(98.43,305.12) 84(78.74,305.12) 85(59.06,305.12) 86(39.37,305.12) 87(19.69,305.12) 88(0,305.12) 89(-19.69,305.12) 90(-39.37,305.12) 91(-59.06,305.12) 92(-78.74,305.12) 93(-98.43,305.12) 94(-118.11,305.12) 95(-137.8,305.12) 96(-157.48,305.12) 97(-177.17,305.12) 98(-196.85,305.12) 99(-216.54,305.12) 100(-236.22,305.12)
  silkscreen extent -355,-285 285,285, body extent -315,-315 315,315, height 65
QFN-24 [mm]
  rect 0.6x0.2 smd: 1(-1.975,1.25) 2(-1.975,0.75) 3(-1.975,0.25) 4(-1.975,-0.25) 5(-1.975,-0.75) 6(-1.975,-1.25) 13(1.925,-1.25) 14(1.925,-0.75) 15(1.925,-0.25) 16(1.925,0.25) 17(1.925,0.75) 18(1.925,1.25)
  rect 0.2x0.6 smd: 7(-1.275,-1.95) 8(-0.775,-1.95) 9(-0.275,-1.95) 10(0.225,-1.95) 11(0.725,-1.95) 12(1.225,-1.95) 19(1.225,1.95) 20(0.725,1.95) 21(0.225,1.95) 22(-0.275,1.95) 23(-0.775,1.95) 24(-1.275,1.95)
  rect 2.55x2.55 smd: 25(-0.025,0)
  silkscreen extent -2.98,1.2 -2.82,1.35, body extent -2.07,-2.05 2.03,2.05, height 0.8
RESC1608N [mm] "Chip Resistor, Body 1.6x0.8mm, IPC Medium Density"
  rect 0.9x1 smd: 1(-0.85,0) 2(0.85,0)
  body extent -0.99,-0.45 0.99,0.53, height 0.43
SC-70-5 [mm]
  rect 0.4x1.2 smd mask+0.05: 1(-0.65,-1) 2(0,-1) 3(0.65,-1)
  rect 0.4x1.2 smd: 4(0.65,0.9) 5(-0.65,0.9)
  silkscreen extent -0.73,-2.28 -0.57,-2.12, body extent -1,-1.1 1,1, height 1.1
SOD-87 [mm]
  rect 1.35x2.1 smd: 1(-1.5,0) 2(1.5,0)
  silkscreen extent -3.08,-1.31 1.47,1.33, body extent -1.7,-0.95 1.7,0.95, height 1.05
SOD-123F [mm]
  rect 1.34x1.8 smd paste-0.025 mask+0.07: 1(-1.43,0) 2(1.43,0)
  silkscreen extent -1.75,-1.1 1.5,1.68, body extent -1.85,-0.8 1.85,0.8, height 1.27
SOIC-16 [mm]
  rect 0.55x1.5 smd: 1(-4.445,-2.7) 2(-3.175,-2.7) 3(-1.905,-2.7) 4(-0.635,-2.7) 5(0.635,-2.7) 6(1.905,-2.7) 7(3.175,-2.7) 8(4.445,-2.7) 9(4.445,2.7) 10(3.175,2.7) 11(1.905,2.7) 12(0.635,2.7) 13(-0.635,2.7) 14(-1.905,2.7) 15(-3.175,2.7) 16(-4.445,2.7)
  silkscreen extent -5,-4 5,1.52, body extent -4.95,-3 4.95,3, height 1.4
SOP-48 [mm]
  rect 1.475x0.3 smd: 1(-3.788,5.75) 2(-3.788,5.25) 3(-3.788,4.75) 4(-3.788,4.25) 5(-3.788,3.75) 6(-3.788,3.25) 7(-3.788,2.75) 8(-3.788,2.25) 9(-3.788,1.75) 10(-3.788,1.25) 11(-3.788,0.75) 12(-3.788,0.25) 13(-3.788,-0.25) 14(-3.788,-0.75) 15(-3.788,-1.25) 16(-3.788,-1.75) 17(-3.788,-2.25) 18(-3.788,-2.75) 19(-3.788,-3.25) 20(-3.788,-3.75) 21(-3.788,-4.25) 22(-3.788,-4.75) 23(-3.788,-5.25) 24(-3.788,-5.75) 25(3.788,-5.75) 26(3.788,-5.25) 27(3.788,-4.75) 28(3.788,-4.25) 29(3.788,-3.75) 30(3.788,-3.25) 31(3.788,-2.75) 32(3.788,-2.25) 33(3.788,-1.75) 34(3.788,-1.25) 35(3.788,-0.75) 36(3.788,-0.25) 37(3.788,0.25) 38(3.788,0.75) 39(3.788,1.25) 40(3.788,1.75) 41(3.788,2.25) 42(3.788,2.75) 43(3.788,3.25) 44(3.788,3.75) 45(3.788,4.25) 46(3.788,4.75) 47(3.788,5.25) 48(3.788,5.75)
  silkscreen extent -5.13,-6.25 2.47,6.25, body extent -4.05,-6.25 4.05,6.25, height 1.2
SOT23-3N [mm] "SOT23, 3-Leads, Body 2.9x1.3mm, Pitch 0.95mm, Lead Span 2.5mm, IPC Medium Density"
  rect 1.5x0.6 smd: 1(-0.95,0.95) 2(-0.95,-0.95) 3(0.95,0)
  silkscreen extent -1.11,-1.5 0.7,1.82, body extent -1.34,-1.52 1.3,1.52, height 0.94
SOT-23-5 [mm] "SOT23, 6-Leads, Body 2,90x2,80mm, Pitch 0,95mm, IPC Medium Density"
  rect 1x0.6 smd: 1(-1.375,0.95) 2(-1.375,0) 3(-1.375,-0.95) 4(1.375,-0.95) 5(1.375,0.95)
  silkscreen extent -1.54,-1.55 0.5,1.87, body extent -1.5,-1.5 1.5,1.5, height 1.46
SOT-143 [mm]
  rect 1.1x1.05 smd: 1(-1.15,0.735)
  rect 1.1x0.6 smd: 2(-1.15,-0.96) 3(1.15,-0.96) 4(1.15,0.96)
  silkscreen extent -1.26,-1.45 0.28,1.88, body extent -1.18,-1.45 1.18,1.45, height 1.22
SOT-223-4 [mm]
  rect 1.75x0.95 smd: 1(-3.15,2.3) 2(-3.15,0) 3(-3.15,-2.3)
  rect 1.75x3.2 smd: 2_1(3.15,0)
  silkscreen extent -3.23,-3.25 1.75,3.33, body extent -3.5,-3.25 3.5,3.25, height 1.8
TP [mm]
  round 1 smd paste-2 mask+0.1: 1(0,0)
  silkscreen extent -0.8,-0.8 0.8,0.8
TSSOP-14 [mm]
  rect 1.475x0.45 smd: 1(-2.938,1.95) 2(-2.938,1.3) 3(-2.938,0.65) 4(-2.938,0) 5(-2.938,-0.65) 6(-2.938,-1.3) 7(-2.938,-1.95) 8(2.938,-1.95) 9(2.938,-1.3) 10(2.938,-0.65) 11(2.938,0) 12(2.938,0.65) 13(2.938,1.3) 14(2.938,1.95)
  silkscreen extent -4.33,-2.5 1.85,2.5, body extent -3.2,-2.5 3.2,2.5, height 1.2

## Part data
C1 C3 C4 C6 C8 C11 C32 C54 C58: library part CAP-000000006, Value 1=10uF, Value 2=35V, DES="Multilayer Ceramic Capacitors MLCC - SMD/SMT 0603 10uF 35volts *Derate Voltage/Temp", FTP=0603, MAN="Murata Electronics", MANREF=GRM188R6YA106MA73D, NOTE=_, Part Number=CAP-000000006, SUP=Mouser, SUPREF=81-GRM188R6YA106MA3D, TOL=20%
C2 C5 C7 C9 C10 C12 C33 C35 C37 C39 C40 C41 C42 C53 C57: library part CAP-000000002, Value 1=100nF, Value 2=50V, DES="VJ0603V104ZXAPW1BC -  Condensateur cÃ©ramique multicouche CMS, 0.1 ÂµF, 50 V, 0603 [1608 Metric], +80%, -20%, Y5V", FTP=0603, MAN=VISHAY, MANREF=VJ0603V104ZXAPW1BC, NOTE=_, Part Number=CAP-000000002, SUP=Farnell, SUPREF=2896408, TOL="+80% -20%"
C13 C15 C17: library part CAP-000000047, Value 1=4.7uF, Value 2=16V, DES="Multilayer Ceramic Capacitors MLCC - SMD/SMT 4.7UF 16V 10% 0603", FTP=0603, MAN="Murata Electronics", MANREF=GRM188C71C475KE21D, NOTE=_, Part Number=CAP-000000047, SUP=Mouser, SUPREF=81-GRM188C71C475KE1D, TOL=10%
C14 C16 C18 C19 C20 C21 C38 C43 C44 C45 C46 C47 C48 C49 C50 C51 C52 C55 C56 C59 C60 C61 C62 C63 C64: library part CAP-000000005, Value 1=100nF, Value 2=10V, DES="C0603X104K8RACTU -  Condensateur cÃ©ramique multicouche CMS, 0.1 ÂµF, 10 V, 0603 [1608 Metric], Â± 10%, X7R", FTP=0603, MAN=KEMET, MANREF=C0603X104K8RACTU, NOTE=_, Part Number=CAP-000000005, SUP=Farnell, SUPREF=2904937, TOL=10%
C22 C24 C26 C28 C30 C34: library part CAP-000000011, Value 1=1uF, Value 2=16V, DES="MULTICOMP 	MC0603F105Z160CT  Condensateur cÃ©ramique multicouche CMS, SÃ©rie MC, 1 ÂµF, +80%, -20%, Y5V, 16 V, 0603 [1608 Metric]", FTP=0603, MAN=MULTICOMP, MANREF=MC0603F105Z160CT, NOTE=_, Part Number=CAP-000000011, SUP=Farnell, SUPREF=1759408, TOL="+80% -20%"
C23 C25 C27 C29 C31: library part CAP-000000003, Value 1=10nF, Value 2=50V, DES="06035C103JAT2A -  Condensateur cÃ©ramique multicouche CMS, 10000 pF, 50 V, 0603 [1608 Metric], Â± 5%, X7R", FTP=0603, MAN=MULTICOMP, MANREF=06035C103JAT2A, NOTE=_, Part Number=CAP-000000003, SUP=Farnell, SUPREF=1833871, TOL=5%
C36: library part CAP-000000001, Value 1=10uF, Value 2=6V3, DES="MCTT21X106M6R3CT -  Condensateur cÃ©ramique multicouche CMS, 10 ÂµF, 6.3 V, 0805 [2012 Metric], Â± 20%, X5R, SÃ©rie MCTT", FTP=0805, MAN=MULTICOMP, MANREF=MCTT21X106M6R3CT, NOTE=_, Part Number=CAP-000000001, SUP=Farnell, SUPREF=1759476, TOL=20%
D1 D8 D9: library part DIR-000000001, Value 1=1A, Value 2=1000V, DES="Rectifiers 1.0A 1000V", FTP=DO-214AC, MAN="ON Semiconductor / Fairchild", MANREF=S1M, NOTE=_, Part Number=DIR-000000001, SUP=Mouser, SUPREF=512-S1M, TOL=_
D2: library part TVS-000000009, Value 1="5.5 V", Value 2="30 pF", DES="ESD Suppressors / TVS Diodes TVS AVAL DIODE SMT", FTP=SOT-143, MAN=Littelfuse, MANREF=SP0503BAHTG, NOTE=_, Part Number=TVS-000000009, SUP=Mouser, SUPREF=576-SP0503BAHTG, TOL=_
D3 D4 D5 D6 D7: library part DIS-000000002, Value 1=2A, Value 2=40V, DES="Schottky Diodes & Rectifiers 40V, 2A SCHOTTKY", FTP=SOD-123-2, MAN="ON Semiconductor / Fairchild", MANREF=SS24FL, NOTE=_, Part Number=DIS-000000002, SUP=Mouser, SUPREF=512-SS24FL, TOL=_
D10 D11 D12 D13: library part DIR-000000003, Value 1=1A, Value 2="200 V", DES="Rectifiers RECTIFIER DIODE SMD 200VOLT", FTP=SOD-87, MAN=Bourns, MANREF=CD1408-FU1200, NOTE=_, Part Number=DIR-000000003, SUP=Mouser, SUPREF=652-CD1408-FU1200, TOL=_
FID1 FID2 FID3: library part MIS-000000004, Value 1=1mm, Value 2=_, DES=_, FTP=_, MAN=_, MANREF=_, NOTE=_, Part Number=MIS-000000004, SUP=_, SUPREF=_, TOL=_
J1: library part CON-000000002, Value 1=16pts, Value 2=2.54mm, DES="Headers & Wire Housings 16P 2 ROW HEADER LP", FTP=THT, MAN="TE Connectivity", MANREF=5103308-3, NOTE=_, Part Number=CON-000000002, SUP=Mouser, SUPREF=571-5103308-3, TOL=_
J2 J5 J6 J8 J9 J10: library part CON-000000001, Value 1=2pts, Value 2="5.08 mm", DES="Pluggable Terminal Blocks Terminal block, pluggable, 5.08, receptical, 2 pole, blue", FTP=THT, MAN="CUI Devices", MANREF="TBP01R2-508-02BE /  /  /  / 39910-0102", NOTE=_, Part Number=CON-000000001, SUP=Mouser, SUPREF=490-TBP01R2-508-02BE, TOL=_
J3: library part CON-000000004, Value 1=3pts, Value 2="2,54 mm", DES="Headers & Wire Housings 2.54MM CGRIDIII HDR 3P V SR SHRD TIN", FTP=THT, MAN=Molex, MANREF=90136-1103, NOTE=_, Part Number=CON-000000004, SUP=Mouser, SUPREF=538-90136-1103, TOL=_
J4 J12: library part CON-000000003, Value 1=6pts, Value 2=2.54mm, DES="Headers & Wire Housings IDC HDR 6P VERT BLUE LOW PRO", FTP=THT, MAN="TE Connectivity", MANREF=2-1761603-1, NOTE=_, Part Number=CON-000000003, SUP=Mouser, SUPREF=571-2-1761603-1
J7: library part CON-000000005, Value 1=_, DES="USB Connectors USB Mini-B Rec Hsg Assy S/T 5Ckt", FTP=THT, MAN=Molex, MANREF=502237-0517, NOTE=_, Part Number=CON-000000005, SUP=Mouser, SUPREF=538-502237-0517, TOL=_, Value 2=_
J11: library part CON-000000006, Value 1=6pts, Value 2=_, DES="Embases et logements de cÃ¢bles WR-PHD 2.54mm Hdr 6P Dual Str Gold", FTP=THT, MAN="Wurth Electronics", MANREF=61300621121, NOTE=_, Part Number=CON-000000006, SUP=Mouser, SUPREF=710-61300621121, TOL=_
K1 K2 K3 K4 K5: library part RLY-000000002, Value 1=5A, Value 2=24VDC, DES="Relais 24V SPST", FTP=THT, MAN="HONGFA RELAY", MANREF="HF 46F/24-HS1TF", NOTE=_, Part Number=RLY-000000002, SUP=AGCONSEILS, SUPREF="HF 46F/24-HS1TF", TOL=_
L1: library part FER-000000001, Value 1=70Ohm, Value 2=0R04, DES="2512067007Y3 -  Perle de ferrite, 1206 [3216 Metric], 70 ohm, 3 A, 0.04 ohm, Â± 25%", FTP=1206, MAN=FAIR-RITE, MANREF=2512067007Y3, NOTE=_, Part Number=FER-000000001, SUP=Farnell, SUPREF=1653393, TOL=25%
Q1: library part TRP-000000008, Value 1=0.5A, Value 2=45V, DES="Bipolar Transistors - BJT SS Low Sat Transistor", FTP=SOT-23, MAN="Diodes Incorporated", MANREF=BC817-40Q-7-F, NOTE=_, Part Number=TRP-000000008, SUP=Mouser, SUPREF=621-BC817-40Q-7-F, TOL=_
R1: library part RES-000000017, Value 1=22.1k, Value 2=0.1W, DES="Thin Film Resistors - SMD 0603 22.1Kohms 25ppm 0.5% AEC-Q200", FTP=0603, MAN=Panasonic, MANREF=ERA-3AED2212V, NOTE=_, Part Number=RES-000000017, SUP=Mouser, SUPREF=667-ERA-3AED2212V, TOL=0.5%
R2: library part RES-000000018, Value 1=47.5k, Value 2=0.1W, DES="Thick Film Resistors - SMD 1/10watt 47.5Kohms 1%", FTP=0603, MAN="Vishay / Dale", MANREF=CRCW060347K5FKEA, NOTE=_, Part Number=RES-000000018, SUP=Mouser, SUPREF=71-CRCW0603-47.5K-E3, TOL=1%
R3 R5: library part RES-000000016, Value 1=470R, Value 2=0.1W, DES="Thick Film Resistors - SMD 470 OHM 1%", FTP=0603, MAN=YAGEO, MANREF=RC0603FR-10470RL, NOTE=_, Part Number=RES-000000016, SUP=Mouser, SUPREF=603-RC0603FR-10470RL, TOL=1%
R4 R13 R46 R47 R48: library part RES-000000006, Value 1=1K, Value 2=0.625W, DES="Thin Film Resistors - SMD 1KOhm .063W 50PPM", FTP=0603, MAN="TE Connectivity / Neohm", MANREF=CPF0603F1K0C1, NOTE=_, Part Number=RES-000000006, SUP=Mouser, SUPREF=279-CPF0603F1K0C1, TOL=1%
R6 R7: library part RES-000000103, Value 1=0R, Value 2=0.125W, DES="Thin Film Resistors - SMD Zero ohm Jumper", FTP=0603, MAN="Vishay / Beyschlag", MANREF=MCT06030Z0000ZP500, NOTE=_, Part Number=RES-000000103, SUP=Mouser, SUPREF=594-MCT06030Z0000ZP5, TOL=_
R8 R49 R50 R51 R52: library part RES-000000001, Value 1=10K, Value 2=0.1W, DES="YAGEO (PHYCOMP)  RC0603FR-0710KL  RESISTANCE COUCHE EPAISSE 10K 0.1W 1%", FTP=0603, MAN=YAGEO, MANREF=RC0603FR-0710KL, NOTE=_, Part Number=RES-000000001, SUP=Farnell, SUPREF=9238603, TOL=1%
R9: library part RES-000000110, Value 1=240R, Value 2=0.1W, DES="RÃ©sistance Ã  puce CMS, Couche Ã©paisse, 240 ohm, Â± 1%, 100 mW, 0603 [1608 Metric], Couche Ã©paisse", FTP=0603, MAN="MULTICOMP PRO", MANREF=MCWR06X2400FTL, NOTE=_, Part Number=RES-000000110, SUP=Farnell, SUPREF=2447305, TOL=1%
R10: library part RES-000000111, Value 1=5K, Value 2=0.5W, DES="Trimmer Resistors - Through Hole 3/8\" 5Kohms Sealed Vertical Adjust", FTP=THT, MAN=Bourns, MANREF=3296W-1-502RLF, NOTE=_, Part Number=RES-000000111, SUP=Mouser, SUPREF=652-3296W-1-502RLF, TOL=10%
R11 R12 R14 R15 R16 R17 R18 R19 R20 R21 R22 R23 R24 R25 R26 R27 R28 R29 R30 R31 R32 R33 R34 R35 R36 R37 R38 R39 R40 R41 R42 R43 R44 R45: library part RES-000000112, Value 1=1K, Value 2=0.625W, DES="Thin Film Resistors - SMD 1KOhm .063W 25PPM", FTP=0603, MAN="TE Connectivity", MANREF=CPF0603B1K0E1, NOTE=_, Part Number=RES-000000112, SUP=Mouser, SUPREF=279-CPF0603B1K0E1, TOL="0.1 %"
RX1 TP1 TP2 TP3 TP4 TP5 TP6 TX1 VBUS VDD: library part MIS-000000003, Value 1=_, DES=_, FTP=_, MAN=_, MANREF=_, NOTE=_, Part Number=MIS-000000003, SUP=_, SUPREF=_, TOL=_, Value 2=_
S1: library part SWC-000000004, Value 1=_, DES="Commutateur tactile, SÃ©rie FSMJSMA, A dÃ©clencheur supÃ©rieur, Montage en surface, Bouton rond", FTP=_, MAN="ALCOSWITCH - TE CONNECTIVITY", MANREF=FSM4JSMA, NOTE=_, Part Number=SWC-000000004, SUP=Farnell, SUPREF=3801305, TOL=_, Value 2=_
U1: library part VRG-000000002, Value 1=12V, Value 2=1.5A, DES="Linear Voltage Regulators 12V 1.5A Positive", FTP=D2PAK, MAN=STMicroelectronics, MANREF=L7812CD2T-TR, NOTE=_, Part Number=VRG-000000002, SUP=Mouser, SUPREF=511-L7812CD2T-TR, TOL=_
U2: library part VRG-000000001, Value 1=5V, Value 2=1.5A, DES="Linear Voltage Regulators 5.0V 1.5A Positive", FTP=D2PAK, MAN=STMicroelectronics, MANREF=L7805CDT-TR, NOTE=_, Part Number=VRG-000000001, SUP=Mouser, SUPREF=511-L7805CDT-TR, TOL=_
U3: library part VRG-000000003, Value 1=3V3, Value 2=1A, DES="Linear Voltage Regulators VLDV Reg Inhibit 0.45V 50uA 500mA", FTP=DPAK, MAN=STMicroelectronics, MANREF=LF33CDT-TRY, NOTE=_, Part Number=VRG-000000003, SUP=Mouser, SUPREF=511-LF33CDT-TRY, TOL=_
U4: library part ICD-000000003, Value 1=_, DES="Darlington Transistors Darlington", FTP=SOIC-16, MAN="Texas Instruments", MANREF=ULN2003AD, NOTE=_, Part Number=ICD-000000003, SUP=Mouser, SUPREF=595-ULN2003AD, TOL=_, Value 2=_
U5: library part MIS-000000025, Value 1=_, DES="Circuit intÃ©grÃ© d'interface USB USBXpress - USB to UART Bridge QFN24", FTP=QFN-24, MAN="SILICON LABS", MANREF=CP2102N-A02-GQFN24, NOTE=_, Part Number=MIS-000000025, SUP=Mouser, SUPREF=634-CP2102NA02GQFN24, TOL=_, Value 2=_
U6: library part MCU-000000001, Value 1=_, DES="ARM Microcontrollers - MCU 32-Bit ARM Cortex M4 72MHz 64kB MCU FPU", FTP=LQFP-100, MAN=STMicroelectronics, MANREF=STM32F373V8T6, NOTE=_, Part Number=MCU-000000001, SUP=Mouser, SUPREF=511-STM32F373V8T6, TOL=_, Value 2=_
U7: library part VRG-000000016, Value 1="1.2 V to 37 V", Value 2=1A, DES="Linear Voltage Regulators 3-TERMINAL ADJ REG", FTP=SOT-223-4, MAN="Texas Instruments", MANREF=LM317AEMP/NOPB, NOTE=_, Part Number=VRG-000000016, SUP=Mouser, SUPREF=926-LM317AEMP/NOPB, TOL=_
U8: library part OPA-000000001, Value 1=_, DES="Operational Amplifiers - Op Amps Single Low-Voltage, Cost-Optimized Rail-to-Rail Output Operational Amplifier 5-SC70 -40 to 125", FTP=SC-70-5, MAN="Texas Instrument", MANREF=LMV321AIDCKR, NOTE=_, Part Number=OPA-000000001, SUP=Mouser, SUPREF=595-LMV321AIDCKR, TOL=_, Value 2=_
U9: library part VRF-000000002, Value 1="2.5 V", Value 2=_, DES="Voltage References 12-ppm/ C low-noise low-power precision voltage reference", FTP=SOT-23-5, MAN="Texas Instruments", MANREF=REF4132A25DBVR, NOTE=_, Part Number=VRF-000000002, SUP=Mouser, SUPREF=595-REF4132A25DBVR, TOL="0.05 %"
U10 U13: library part MIS-000000001, Value 1=_, DES="Commutateur analogique, 8 Canal(aux), SPDT, 8 ohm, 3V Ã  3.6V, TSSOP, 48 Broche(s)", FTP=SOP-48, MAN="DIODES INC", MANREF=PI3L301DAEX, NOTE=_, Part Number=MIS-000000001, SUP=Farneel, SUPREF=3483212, TOL=_, Value 2=_
U11 U12 U14 U15: library part OPA-000000002, Value 1=_, DES="Operational Amplifiers - Op Amps 4-Channel, 1MHz, RRIO, 1.8V to 5.5V Operational Amplifier for Cost-Optimized Systems 14-TSSOP -40 to 125", FTP=TSSOP-14, MAN="Texas Instrument", MANREF=TLV9004IPWR, NOTE=_, Part Number=OPA-000000002, SUP=Mouser, SUPREF=595-TLV9004IPWR, TOL=_, Value 2=_
U16: library part VRF-000000001, Value 1=3V, Value 2=_, DES="Voltage References Automotive 20-ppm/-C (max), 100--A, 3-pin SOT-23 series voltage reference 3-SOT-23 -40 to 125", FTP=SOT-23-3, MAN="Texas Instruments", MANREF=REF3130AQDBZRQ1, NOTE=_, Part Number=VRF-000000001, SUP=Mouser, SUPREF=595-REF3130AQDBZRQ1, TOL="0.2 %"

## Free pads (board coordinates)
  round 0 hole 4 unplated mask+0.1: MH(10.209,82.393) MH(10.234,4.693)
  round 6 hole 4 mask+0.1: MH(112.326,4.85) MH(112.6,82.5)

## Via types
v1: diameter 0.7, hole 0.3, Top Layer to Bottom Layer, tented both sides, 207 vias
v2: diameter 0.7, hole 0.3, Top Layer to Bottom Layer, 1 vias

## Nets (pads, with @x,y where several pads share a name; then routed paths per layer and width w, separated by ;. In a path a pad name is that pad's centre, name@x,y a point inside that pad or via, vN(x,y) a via of type N, cw(c..) or ccw(c..) an arc to the next point about the centre after c; other vN are vias at no path point)
2V5: C55.2 U9.5 U10.28 U10.29 U10.34 U10.35 U10.41 U10.42 U10.47 U10.48 U13.28 U13.29 U13.34 U13.35 U13.41 U13.42 U13.47 U13.48 | length 56.3
  Top Layer w0.3: v1(87.375,59.728) 87.44,59.793 U13.42@89.472,59.793 U13.41@89.472,59.293 ; v1(87.375,62.25) 87.418,62.293 U13.47@89.472,62.293 U13.48@89.472,62.793 ; v1(87.418,41.796) 89.45,41.796 C55.2@89.498,41.844 ; v1(87.437,53.293) U13.29@89.472,53.293 U13.28@89.472,52.793 ; v1(87.448,56.093) 87.448,56.117 87.623,56.293 U13.35@89.472,56.293 U13.34@89.472,55.793 ; v1(87.449,30.186) U10.28@89.547,30.186 U10.29@89.547,30.686 ; v1(87.449,33.192) 87.454,33.186 U10.34@89.547,33.186 U10.35@89.547,33.686 ; v1(87.449,36.68) 87.455,36.686 U10.41@89.547,36.686 U10.42@89.547,37.186 ; U9.5@89.503,43.521 89.503,41.85 C55.2@89.498,41.844 ; U10.47@89.547,39.686 89.498,39.686 C55.2@89.498,41.844
  Bottom Layer w0.3: v1(87.375,62.25) 87.412,62.213 v1@87.412,56.285 ; v1@87.442,56.093 v1@87.442,56.28 ; v1(87.448,56.093) 87.442,56.088 87.442,53.323 87.412,53.293 87.412,30.224 v1(87.449,30.186)
3V3: C1.2 C12.1 C39.1 C40.1 C41.1 C42.1 C43.2 C44.2 C45.2 C46.2 C47.2 C48.2 C49.2 C50.2 C51.2 C52.2 C59.2 C60.2 D10.1 D11.1 D12.1 D13.1 J11.6 J12.1 L1.1 TP3.1 U3.3 U10.1 U10.6 U10.12 U10.19 U10.36 U11.4 U12.4 U13.1 U13.6 U13.12 U13.19 U13.36 U14.4 U15.4 | length 289.2
  Top Layer w0.3: D13.1@44.961,73.897 45.011,73.947 D12.1@48.114,73.947 48.15,73.983 v1(48.15,75.675) ; D11.1@54.647,73.904 57.781,73.904 57.85,73.973 v1(57.85,75.482) ; J12.1@55.275,82.073 61.16,82.073 C60.2@61.223,82.135 61.223,78.155 66.118,73.261 66.118,64.681 J11.6@66.012,64.575 66.083,64.504 C48.2@81.912,64.504 81.896,64.488 U13.1@81.896,62.793 v1(83.676,62.793) ; v1(65.2,30.575) 66.432,31.807 L1.1@66.432,31.97 ; TP3.1@76.32,21.715 76.389,21.783 78.975,21.783 83.725,26.533 v1(83.725,31.205) 83.707,31.186 U10.19@81.971,31.186 C46.2@80.153,31.186 ; C51.2@80.059,53.743 80.109,53.793 U13.19@81.896,53.793 v1(83.707,53.793) ; C50.2@80.059,57.243 80.109,57.293 U13.12@81.896,57.293 83.743,57.293 v1(83.75,57.287) 84.243,56.793 U13.36@89.472,56.793 91.284,56.793 C52.2@91.309,56.768 91.378,56.699 v1(91.378,55.681) ; C49.2@80.059,60.243 80.109,60.293 U13.6@81.896,60.293 83.672,60.293 v1(83.701,60.322) ; C44.2@80.127,37.684 80.13,37.686 U10.6@81.971,37.686 v1(83.707,37.686) ; C45.2@80.128,34.661 80.153,34.686 U10.12@81.971,34.686 v1(83.707,34.686) 84.104,34.289 84.207,34.186 U10.36@89.547,34.186 ; C43.2@81.971,41.911 U10.1@81.971,40.186 v1(83.707,40.186) ; v1(91.378,32.977) C47.2@91.378,34.186 ; C39.1@99.121,49.863 99.134,49.85 U11.4@99.134,47.256 99.125,47.247 v1(99.125,45.555) ; C41.1@99.359,76.006 U12.4@99.359,73.469 99.38,73.449 99.38,72.12 v1(99.4,72.1) ; C40.1@106.465,37.693 106.434,37.662 U14.4@106.434,34.806 106.378,34.75 106.378,33.107 v1(106.479,33.005) ; C42.1@106.684,63.283 U15.4@106.684,60.256 106.708,60.232 106.708,58.844 v1(106.731,58.82)
  Top Layer w0.5: U3.3@76.32,15.769 TP3.1@76.32,21.715
  Bottom Layer w0.3: v1(48.15,75.675) 57.549,75.675 57.742,75.482 v1(57.85,75.482) 57.85,80.776 56.551,82.076 56.548,82.073 J12.1@55.275,82.073 ; v1(65.2,30.575) 73.98,21.795 v1(77.925,21.795) ; v1(83.676,62.793) 83.701,62.769 v1(83.701,60.322) 83.701,53.793 83.701,31.229 v1(83.725,31.205) ; v1(91.378,32.977) 95.877,32.977 96.825,33.925 97.675,33.925 97.706,33.894 100.909,33.894 101.799,33.005 v1(106.479,33.005) 106.479,41.821 102.745,45.555 v1(99.125,45.555) 96.32,45.555 91.378,50.497 v1(91.378,55.681) 91.378,66.728 96.75,72.1 v1(99.4,72.1) 101.742,72.1 106.731,67.11 v1(106.731,58.82)